# EAGLE board SparkFun_MPU-9250_Breakout.v10a (EAGLE 7.5.0), part 1 of 7
DESIGNER: Brent Wilkins; VERSION: v10
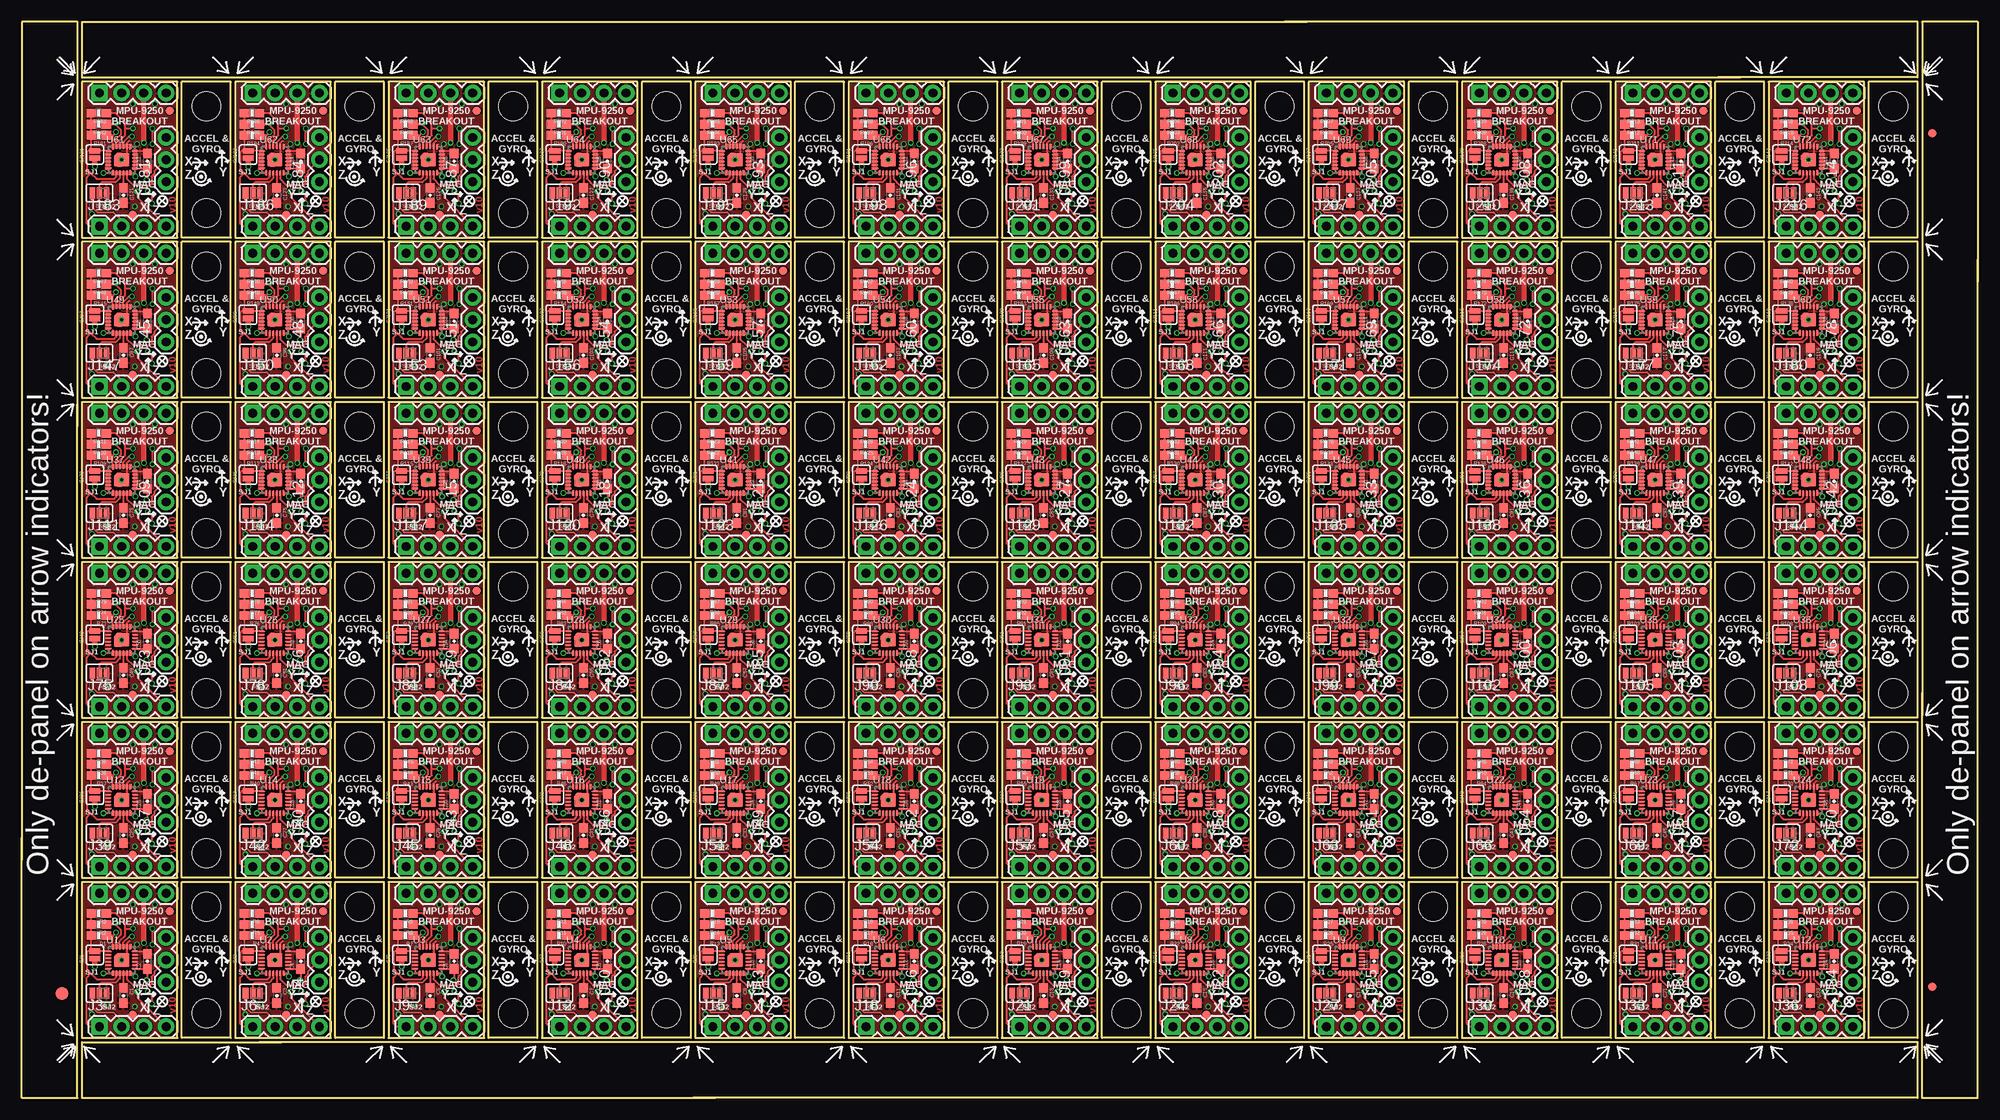
[diagram p0: board, top side]
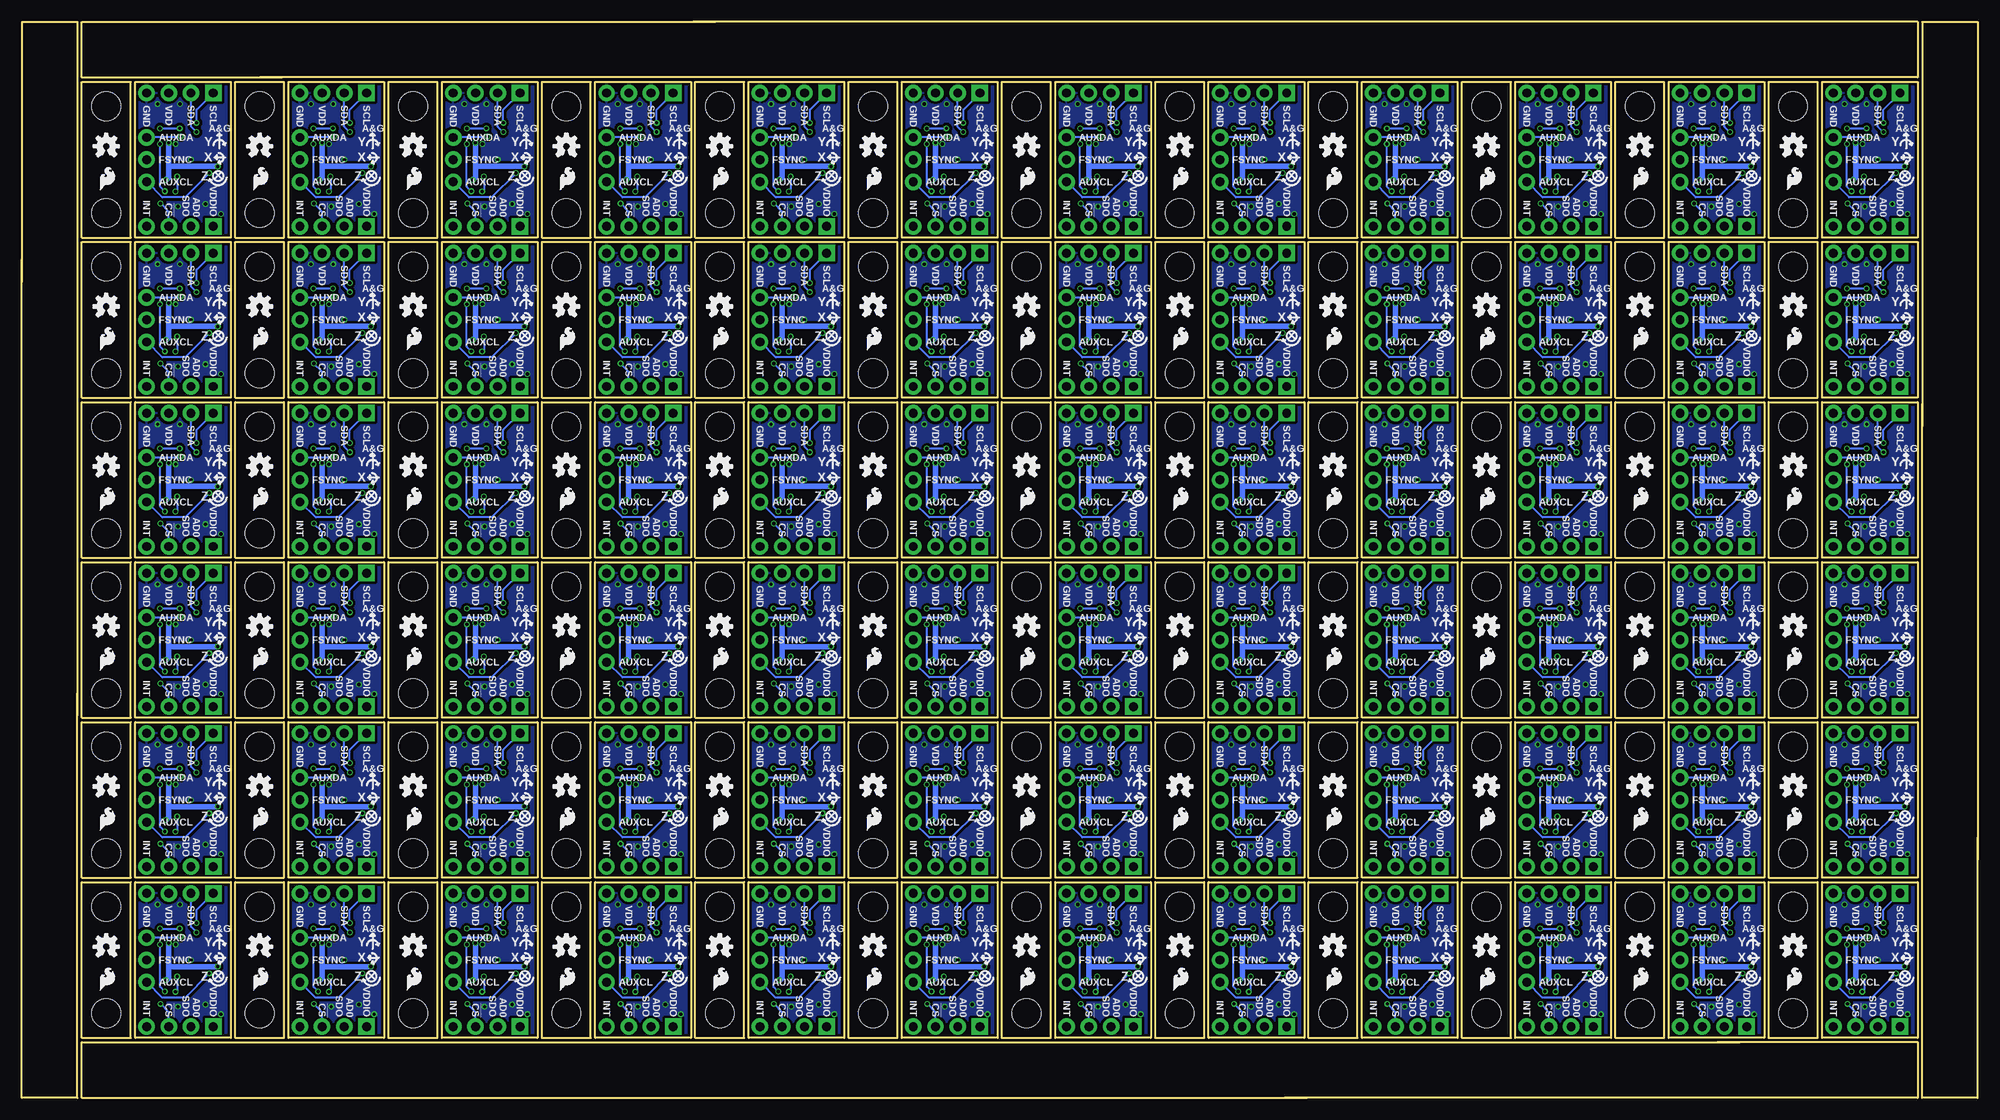
[diagram p1: board, bottom side, seen from below]

Size 223.52 x 122.94 mm. Coordinates in mm from the lower left corner, seen from the top.
Outline: 600 segments
Copper layers (1*16): Top 0.035mm / dielectric 1.5mm / Bottom 0.035mm
Design rules "SparkFun-2-layer-FAB-LIMIT": minimum track width 4mil, minimum drill 6mil, track to track 4mil, track to pad 4mil, pad to pad 4mil, via to via 4mil, smd to smd 4mil, copper to edge 4mil, drill to drill 4mil, minimum pad ring 5mil, minimum via ring 5mil, stop-mask expansion 4mil, vias tented up to drill 20mil, thermal gap 10mil

## Footprints (pad centres in the part's own frame; a part is rotated, then mirrored left to right if it is on the bottom)
0603-CAP = smd 1.1 x 1: 1 -0.85,0; 2 0.85,0
FIDUCIAL-1.5X3 = smd 1.5 x 1.5: 1 0,0
FIDUCIAL-1X2 = smd 1 x 1: 1 0,0
1X04 = drill 1.016 pad 1.88 square: 1 0,0 | drill 1.016 pad 1.88: 2 2.54,0; 3 5.08,0; 4 7.62,0
1X03 = drill 1.016 pad 1.88: 1 0,0; 2 2.54,0; 3 5.08,0
0603-RES = smd 1.1 x 1: 1 -0.85,0; 2 0.85,0
PAD-JUMPER-2-NC_BY_PASTE_YES_SILK_FULL_BOX = smd 0.635 x 1.27: 1 -0.412,0; 2 0.412,0
PAD-HUMPER-3-1&2_NC_BY_PASTE_YES_SILK_FULL_BOX = smd 0.635 x 1.27: 1 -0.813,0; 2 0,0; 3 0.813,0
STAND-OFF = hole 3.302: 0,0
QFN24_PAD = smd 0.5 x 0.25: 1 -1.55,1; 2 -1.55,0.6; 3 -1.55,0.2; 4 -1.55,-0.2; 5 -1.55,-0.6; 6 -1.55,-1; 13 1.55,-1; 14 1.55,-0.6; 15 1.55,-0.2; 16 1.55,0.2; 17 1.55,0.6; 18 1.55,1 | smd 0.08 x 0.13: 1$1 -1.32,1.06; 1$3 -1.26,0.94; P$33 1.26,-0.94; P$34 1.32,-1.06; P$58 1.26,0.94; P$59 1.32,1.06; P$68 -1.26,-0.94; P$69 -1.32,-1.06 | smd 0.1 x 0.185 rotated 45: 1$2 -1.25,1.024; P$49 1.024,-1.25 | smd 0.14 x 0.14: 1$4 -1.22,0.945; P$23 -0.945,-1.22; P$24 1.22,-0.945; P$36 0.945,1.22; P$51 0.945,-1.22; P$56 1.22,0.945; P$61 -0.945,1.22; P$66 -1.22,-0.945 | smd 0.05 x 0.05: 1$5 -1.175,0.97; P$25 -0.97,-1.175; P$31 1.175,-0.97; P$37 0.97,1.175; P$52 0.97,-1.175; P$57 1.175,0.97; P$62 -0.97,1.175; P$67 -1.175,-0.97 | smd 0.25 x 0.5: 7 -1,-1.55; 8 -0.6,-1.55; 9 -0.2,-1.55; 10 0.2,-1.55; 11 0.6,-1.55; 12 1,-1.55; 19 1,1.55; 20 0.6,1.55; 21 0.2,1.55; 22 -0.2,1.55; 23 -0.6,1.55; 24 -1,1.55 | smd 0.25 x 0.25: CENTER 0,0 | smd 0.4 x 0.4: DBBADFE -0.675,0.24 | smd 0.6 x 1.2: DBBADFE1 -0.575,-0.195 | smd 0.25 x 0.3: P$1 -0.2,1.3; P$3 0.2,1.3; P$5 0.6,1.3; P$11 -0.6,1.3; P$16 0.2,-1.3; P$18 -0.2,-1.3; P$20 -0.6,-1.3; P$26 0.6,-1.3 | smd 0.3 x 0.25: P$2 -1.3,0.2; P$4 -1.3,0.6; P$28 -1.3,-0.2; P$38 -1.3,-0.6; P$40 1.3,0.2; P$42 1.3,-0.2; P$44 1.3,-0.6; P$50 1.3,0.6 | smd 0.1 x 0.185 rotated 225: P$7 1.25,-1.024; P$60 -1.024,1.25 | smd 1.1 x 1.59: P$13 0.325,0 | smd 0.3 x 0.5 rotated 315: P$14 -0.592,0.512 | smd 0.5 x 1.59: P$15 -0.27,0 | smd 0.1 x 0.185 rotated 135: P$22 -1.024,-1.25; P$55 1.25,1.024 | smd 0.13 x 0.08: P$27 -0.94,-1.26; P$29 -1.06,-1.32; P$39 0.94,1.26; P$41 1.06,1.32; P$53 0.94,-1.26; P$54 1.06,-1.32; P$63 -0.94,1.26; P$64 -1.06,1.32 | smd 0.1 x 0.185 rotated 315: P$35 1.024,1.25; P$65 -1.25,-1.024

## Placement (x,y rotation side)
C1  0.1uF  [0603-CAP]  11.61,11.68 270 top
C2  0.1uF  [0603-CAP]  14.35,15.6 90 top
C3  0.1uF  [0603-CAP]  29.13,11.68 270 top
C4  0.1uF  [0603-CAP]  31.88,15.6 90 top
C5  0.1uF  [0603-CAP]  46.66,11.68 270 top
C6  0.1uF  [0603-CAP]  49.4,15.6 90 top
C7  0.1uF  [0603-CAP]  64.19,11.68 270 top
C8  0.1uF  [0603-CAP]  66.93,15.6 90 top
C9  0.1uF  [0603-CAP]  81.71,11.68 270 top
C10  0.1uF  [0603-CAP]  84.45,15.6 90 top
C11  0.1uF  [0603-CAP]  99.24,11.68 270 top
C12  0.1uF  [0603-CAP]  101.98,15.6 90 top
C13  0.1uF  [0603-CAP]  116.76,11.68 270 top
C14  0.1uF  [0603-CAP]  119.51,15.6 90 top
C15  0.1uF  [0603-CAP]  134.29,11.68 270 top
C16  0.1uF  [0603-CAP]  137.03,15.6 90 top
C17  0.1uF  [0603-CAP]  151.82,11.68 270 top
C18  0.1uF  [0603-CAP]  154.56,15.6 90 top
C19  0.1uF  [0603-CAP]  169.34,11.68 270 top
C20  0.1uF  [0603-CAP]  172.09,15.6 90 top
C21  0.1uF  [0603-CAP]  186.87,11.68 270 top
C22  0.1uF  [0603-CAP]  189.61,15.6 90 top
C23  0.1uF  [0603-CAP]  204.39,11.68 270 top
C24  0.1uF  [0603-CAP]  207.14,15.6 90 top
C25  0.1uF  [0603-CAP]  11.61,29.97 270 top
C26  0.1uF  [0603-CAP]  14.35,33.88 90 top
C27  0.1uF  [0603-CAP]  29.13,29.97 270 top
C28  0.1uF  [0603-CAP]  31.88,33.88 90 top
C29  0.1uF  [0603-CAP]  46.66,29.97 270 top
C30  0.1uF  [0603-CAP]  49.4,33.88 90 top
C31  0.1uF  [0603-CAP]  64.19,29.97 270 top
C32  0.1uF  [0603-CAP]  66.93,33.88 90 top
C33  0.1uF  [0603-CAP]  81.71,29.97 270 top
C34  0.1uF  [0603-CAP]  84.45,33.88 90 top
C35  0.1uF  [0603-CAP]  99.24,29.97 270 top
C36  0.1uF  [0603-CAP]  101.98,33.88 90 top
C37  0.1uF  [0603-CAP]  116.76,29.97 270 top
C38  0.1uF  [0603-CAP]  119.51,33.88 90 top
C39  0.1uF  [0603-CAP]  134.29,29.97 270 top
C40  0.1uF  [0603-CAP]  137.03,33.88 90 top
C41  0.1uF  [0603-CAP]  151.82,29.97 270 top
C42  0.1uF  [0603-CAP]  154.56,33.88 90 top
C43  0.1uF  [0603-CAP]  169.34,29.97 270 top
C44  0.1uF  [0603-CAP]  172.09,33.88 90 top
C45  0.1uF  [0603-CAP]  186.87,29.97 270 top
C46  0.1uF  [0603-CAP]  189.61,33.88 90 top
C47  0.1uF  [0603-CAP]  204.39,29.97 270 top
C48  0.1uF  [0603-CAP]  207.14,33.88 90 top
C49  0.1uF  [0603-CAP]  11.61,48.26 270 top
C50  0.1uF  [0603-CAP]  14.35,52.17 90 top
C51  0.1uF  [0603-CAP]  29.13,48.26 270 top
C52  0.1uF  [0603-CAP]  31.88,52.17 90 top
C53  0.1uF  [0603-CAP]  46.66,48.26 270 top
C54  0.1uF  [0603-CAP]  49.4,52.17 90 top
C55  0.1uF  [0603-CAP]  64.19,48.26 270 top
C56  0.1uF  [0603-CAP]  66.93,52.17 90 top
C57  0.1uF  [0603-CAP]  81.71,48.26 270 top
C58  0.1uF  [0603-CAP]  84.45,52.17 90 top
C59  0.1uF  [0603-CAP]  99.24,48.26 270 top
C60  0.1uF  [0603-CAP]  101.98,52.17 90 top
C61  0.1uF  [0603-CAP]  116.76,48.26 270 top
C62  0.1uF  [0603-CAP]  119.51,52.17 90 top
C63  0.1uF  [0603-CAP]  134.29,48.26 270 top
C64  0.1uF  [0603-CAP]  137.03,52.17 90 top
C65  0.1uF  [0603-CAP]  151.82,48.26 270 top
C66  0.1uF  [0603-CAP]  154.56,52.17 90 top
C67  0.1uF  [0603-CAP]  169.34,48.26 270 top
C68  0.1uF  [0603-CAP]  172.09,52.17 90 top
C69  0.1uF  [0603-CAP]  186.87,48.26 270 top
C70  0.1uF  [0603-CAP]  189.61,52.17 90 top
C71  0.1uF  [0603-CAP]  204.39,48.26 270 top
C72  0.1uF  [0603-CAP]  207.14,52.17 90 top
C73  0.1uF  [0603-CAP]  11.61,66.55 270 top
C74  0.1uF  [0603-CAP]  14.35,70.46 90 top
C75  0.1uF  [0603-CAP]  29.13,66.55 270 top
C76  0.1uF  [0603-CAP]  31.88,70.46 90 top
C77  0.1uF  [0603-CAP]  46.66,66.55 270 top
C78  0.1uF  [0603-CAP]  49.4,70.46 90 top
C79  0.1uF  [0603-CAP]  64.19,66.55 270 top
C80  0.1uF  [0603-CAP]  66.93,70.46 90 top
C81  0.1uF  [0603-CAP]  81.71,66.55 270 top
C82  0.1uF  [0603-CAP]  84.45,70.46 90 top
C83  0.1uF  [0603-CAP]  99.24,66.55 270 top
C84  0.1uF  [0603-CAP]  101.98,70.46 90 top
C85  0.1uF  [0603-CAP]  116.76,66.55 270 top
C86  0.1uF  [0603-CAP]  119.51,70.46 90 top
C87  0.1uF  [0603-CAP]  134.29,66.55 270 top
C88  0.1uF  [0603-CAP]  137.03,70.46 90 top
C89  0.1uF  [0603-CAP]  151.82,66.55 270 top
C90  0.1uF  [0603-CAP]  154.56,70.46 90 top
C91  0.1uF  [0603-CAP]  169.34,66.55 270 top
C92  0.1uF  [0603-CAP]  172.09,70.46 90 top
C93  0.1uF  [0603-CAP]  186.87,66.55 270 top
C94  0.1uF  [0603-CAP]  189.61,70.46 90 top
C95  0.1uF  [0603-CAP]  204.39,66.55 270 top
C96  0.1uF  [0603-CAP]  207.14,70.46 90 top
C97  0.1uF  [0603-CAP]  11.61,84.84 270 top
C98  0.1uF  [0603-CAP]  14.35,88.75 90 top
C99  0.1uF  [0603-CAP]  29.13,84.84 270 top
C100  0.1uF  [0603-CAP]  31.88,88.75 90 top
C101  0.1uF  [0603-CAP]  46.66,84.84 270 top
C102  0.1uF  [0603-CAP]  49.4,88.75 90 top
C103  0.1uF  [0603-CAP]  64.19,84.84 270 top
C104  0.1uF  [0603-CAP]  66.93,88.75 90 top
C105  0.1uF  [0603-CAP]  81.71,84.84 270 top
C106  0.1uF  [0603-CAP]  84.45,88.75 90 top
C107  0.1uF  [0603-CAP]  99.24,84.84 270 top
C108  0.1uF  [0603-CAP]  101.98,88.75 90 top
C109  0.1uF  [0603-CAP]  116.76,84.84 270 top
C110  0.1uF  [0603-CAP]  119.51,88.75 90 top
C111  0.1uF  [0603-CAP]  134.29,84.84 270 top
C112  0.1uF  [0603-CAP]  137.03,88.75 90 top
C113  0.1uF  [0603-CAP]  151.82,84.84 270 top
C114  0.1uF  [0603-CAP]  154.56,88.75 90 top
C115  0.1uF  [0603-CAP]  169.34,84.84 270 top
C116  0.1uF  [0603-CAP]  172.09,88.75 90 top
C117  0.1uF  [0603-CAP]  186.87,84.84 270 top
C118  0.1uF  [0603-CAP]  189.61,88.75 90 top
C119  0.1uF  [0603-CAP]  204.39,84.84 270 top
C120  0.1uF  [0603-CAP]  207.14,88.75 90 top
C121  0.1uF  [0603-CAP]  11.61,103.12 270 top
C122  0.1uF  [0603-CAP]  14.35,107.04 90 top
C123  0.1uF  [0603-CAP]  29.13,103.12 270 top
C124  0.1uF  [0603-CAP]  31.88,107.04 90 top
C125  0.1uF  [0603-CAP]  46.66,103.12 270 top
C126  0.1uF  [0603-CAP]  49.4,107.04 90 top
C127  0.1uF  [0603-CAP]  64.19,103.12 270 top
C128  0.1uF  [0603-CAP]  66.93,107.04 90 top
C129  0.1uF  [0603-CAP]  81.71,103.12 270 top
C130  0.1uF  [0603-CAP]  84.45,107.04 90 top
C131  0.1uF  [0603-CAP]  99.24,103.12 270 top
C132  0.1uF  [0603-CAP]  101.98,107.04 90 top
C133  0.1uF  [0603-CAP]  116.76,103.12 270 top
C134  0.1uF  [0603-CAP]  119.51,107.04 90 top
C135  0.1uF  [0603-CAP]  134.29,103.12 270 top
C136  0.1uF  [0603-CAP]  137.03,107.04 90 top
C137  0.1uF  [0603-CAP]  151.82,103.12 270 top
C138  0.1uF  [0603-CAP]  154.56,107.04 90 top
C139  0.1uF  [0603-CAP]  169.34,103.12 270 top
C140  0.1uF  [0603-CAP]  172.09,107.04 90 top
C141  0.1uF  [0603-CAP]  186.87,103.12 270 top
C142  0.1uF  [0603-CAP]  189.61,107.04 90 top
C143  0.1uF  [0603-CAP]  204.39,103.12 270 top
C144  0.1uF  [0603-CAP]  207.14,107.04 90 top
E$1  [FIDUCIAL-1.5X3]  4.57,11.94 0 top
E$5  [FIDUCIAL-1X2]  218.31,110.24 180 top
E$6  [FIDUCIAL-1X2]  218.31,12.7 0 top
FID1  FIDUCIAL1X2  [FIDUCIAL-1X2]  16.92,21.34 0 top
FID2  FIDUCIAL1X2  [FIDUCIAL-1X2]  12.67,9.47 0 top
FID3  FIDUCIAL1X2  [FIDUCIAL-1X2]  34.44,21.34 0 top
FID4  FIDUCIAL1X2  [FIDUCIAL-1X2]  30.2,9.47 0 top
FID5  FIDUCIAL1X2  [FIDUCIAL-1X2]  51.97,21.34 0 top
FID6  FIDUCIAL1X2  [FIDUCIAL-1X2]  47.73,9.47 0 top
FID7  FIDUCIAL1X2  [FIDUCIAL-1X2]  69.49,21.34 0 top
FID8  FIDUCIAL1X2  [FIDUCIAL-1X2]  65.25,9.47 0 top
FID9  FIDUCIAL1X2  [FIDUCIAL-1X2]  87.02,21.34 0 top
FID10  FIDUCIAL1X2  [FIDUCIAL-1X2]  82.78,9.47 0 top
FID11  FIDUCIAL1X2  [FIDUCIAL-1X2]  104.55,21.34 0 top
FID12  FIDUCIAL1X2  [FIDUCIAL-1X2]  100.3,9.47 0 top
FID13  FIDUCIAL1X2  [FIDUCIAL-1X2]  122.07,21.34 0 top
FID14  FIDUCIAL1X2  [FIDUCIAL-1X2]  117.83,9.47 0 top
FID15  FIDUCIAL1X2  [FIDUCIAL-1X2]  139.6,21.34 0 top
FID16  FIDUCIAL1X2  [FIDUCIAL-1X2]  135.36,9.47 0 top
FID17  FIDUCIAL1X2  [FIDUCIAL-1X2]  157.12,21.34 0 top
FID18  FIDUCIAL1X2  [FIDUCIAL-1X2]  152.88,9.47 0 top
FID19  FIDUCIAL1X2  [FIDUCIAL-1X2]  174.65,21.34 0 top
FID20  FIDUCIAL1X2  [FIDUCIAL-1X2]  170.41,9.47 0 top
FID21  FIDUCIAL1X2  [FIDUCIAL-1X2]  192.18,21.34 0 top
FID22  FIDUCIAL1X2  [FIDUCIAL-1X2]  187.93,9.47 0 top
FID23  FIDUCIAL1X2  [FIDUCIAL-1X2]  209.7,21.34 0 top
FID24  FIDUCIAL1X2  [FIDUCIAL-1X2]  205.46,9.47 0 top
FID25  FIDUCIAL1X2  [FIDUCIAL-1X2]  16.92,39.62 0 top
FID26  FIDUCIAL1X2  [FIDUCIAL-1X2]  12.67,27.76 0 top
FID27  FIDUCIAL1X2  [FIDUCIAL-1X2]  34.44,39.62 0 top
FID28  FIDUCIAL1X2  [FIDUCIAL-1X2]  30.2,27.76 0 top
FID29  FIDUCIAL1X2  [FIDUCIAL-1X2]  51.97,39.62 0 top
FID30  FIDUCIAL1X2  [FIDUCIAL-1X2]  47.73,27.76 0 top
FID31  FIDUCIAL1X2  [FIDUCIAL-1X2]  69.49,39.62 0 top
FID32  FIDUCIAL1X2  [FIDUCIAL-1X2]  65.25,27.76 0 top
FID33  FIDUCIAL1X2  [FIDUCIAL-1X2]  87.02,39.62 0 top
FID34  FIDUCIAL1X2  [FIDUCIAL-1X2]  82.78,27.76 0 top
FID35  FIDUCIAL1X2  [FIDUCIAL-1X2]  104.55,39.62 0 top
FID36  FIDUCIAL1X2  [FIDUCIAL-1X2]  100.3,27.76 0 top
FID37  FIDUCIAL1X2  [FIDUCIAL-1X2]  122.07,39.62 0 top
FID38  FIDUCIAL1X2  [FIDUCIAL-1X2]  117.83,27.76 0 top
FID39  FIDUCIAL1X2  [FIDUCIAL-1X2]  139.6,39.62 0 top
FID40  FIDUCIAL1X2  [FIDUCIAL-1X2]  135.36,27.76 0 top
FID41  FIDUCIAL1X2  [FIDUCIAL-1X2]  157.12,39.62 0 top
FID42  FIDUCIAL1X2  [FIDUCIAL-1X2]  152.88,27.76 0 top
FID43  FIDUCIAL1X2  [FIDUCIAL-1X2]  174.65,39.62 0 top
FID44  FIDUCIAL1X2  [FIDUCIAL-1X2]  170.41,27.76 0 top
FID45  FIDUCIAL1X2  [FIDUCIAL-1X2]  192.18,39.62 0 top
FID46  FIDUCIAL1X2  [FIDUCIAL-1X2]  187.93,27.76 0 top
FID47  FIDUCIAL1X2  [FIDUCIAL-1X2]  209.7,39.62 0 top
FID48  FIDUCIAL1X2  [FIDUCIAL-1X2]  205.46,27.76 0 top
FID49  FIDUCIAL1X2  [FIDUCIAL-1X2]  16.92,57.91 0 top
FID50  FIDUCIAL1X2  [FIDUCIAL-1X2]  12.67,46.05 0 top
FID51  FIDUCIAL1X2  [FIDUCIAL-1X2]  34.44,57.91 0 top
FID52  FIDUCIAL1X2  [FIDUCIAL-1X2]  30.2,46.05 0 top
FID53  FIDUCIAL1X2  [FIDUCIAL-1X2]  51.97,57.91 0 top
FID54  FIDUCIAL1X2  [FIDUCIAL-1X2]  47.73,46.05 0 top
FID55  FIDUCIAL1X2  [FIDUCIAL-1X2]  69.49,57.91 0 top
FID56  FIDUCIAL1X2  [FIDUCIAL-1X2]  65.25,46.05 0 top
FID57  FIDUCIAL1X2  [FIDUCIAL-1X2]  87.02,57.91 0 top
FID58  FIDUCIAL1X2  [FIDUCIAL-1X2]  82.78,46.05 0 top
FID59  FIDUCIAL1X2  [FIDUCIAL-1X2]  104.55,57.91 0 top
FID60  FIDUCIAL1X2  [FIDUCIAL-1X2]  100.3,46.05 0 top
FID61  FIDUCIAL1X2  [FIDUCIAL-1X2]  122.07,57.91 0 top
FID62  FIDUCIAL1X2  [FIDUCIAL-1X2]  117.83,46.05 0 top
FID63  FIDUCIAL1X2  [FIDUCIAL-1X2]  139.6,57.91 0 top
FID64  FIDUCIAL1X2  [FIDUCIAL-1X2]  135.36,46.05 0 top
FID65  FIDUCIAL1X2  [FIDUCIAL-1X2]  157.12,57.91 0 top
FID66  FIDUCIAL1X2  [FIDUCIAL-1X2]  152.88,46.05 0 top
FID67  FIDUCIAL1X2  [FIDUCIAL-1X2]  174.65,57.91 0 top
FID68  FIDUCIAL1X2  [FIDUCIAL-1X2]  170.41,46.05 0 top
FID69  FIDUCIAL1X2  [FIDUCIAL-1X2]  192.18,57.91 0 top
FID70  FIDUCIAL1X2  [FIDUCIAL-1X2]  187.93,46.05 0 top
FID71  FIDUCIAL1X2  [FIDUCIAL-1X2]  209.7,57.91 0 top
FID72  FIDUCIAL1X2  [FIDUCIAL-1X2]  205.46,46.05 0 top
FID73  FIDUCIAL1X2  [FIDUCIAL-1X2]  16.92,76.2 0 top
FID74  FIDUCIAL1X2  [FIDUCIAL-1X2]  12.67,64.34 0 top
FID75  FIDUCIAL1X2  [FIDUCIAL-1X2]  34.44,76.2 0 top
FID76  FIDUCIAL1X2  [FIDUCIAL-1X2]  30.2,64.34 0 top
FID77  FIDUCIAL1X2  [FIDUCIAL-1X2]  51.97,76.2 0 top
FID78  FIDUCIAL1X2  [FIDUCIAL-1X2]  47.73,64.34 0 top
FID79  FIDUCIAL1X2  [FIDUCIAL-1X2]  69.49,76.2 0 top
FID80  FIDUCIAL1X2  [FIDUCIAL-1X2]  65.25,64.34 0 top
FID81  FIDUCIAL1X2  [FIDUCIAL-1X2]  87.02,76.2 0 top
FID82  FIDUCIAL1X2  [FIDUCIAL-1X2]  82.78,64.34 0 top
FID83  FIDUCIAL1X2  [FIDUCIAL-1X2]  104.55,76.2 0 top
FID84  FIDUCIAL1X2  [FIDUCIAL-1X2]  100.3,64.34 0 top
FID85  FIDUCIAL1X2  [FIDUCIAL-1X2]  122.07,76.2 0 top
FID86  FIDUCIAL1X2  [FIDUCIAL-1X2]  117.83,64.34 0 top
FID87  FIDUCIAL1X2  [FIDUCIAL-1X2]  139.6,76.2 0 top
FID88  FIDUCIAL1X2  [FIDUCIAL-1X2]  135.36,64.34 0 top
FID89  FIDUCIAL1X2  [FIDUCIAL-1X2]  157.12,76.2 0 top
FID90  FIDUCIAL1X2  [FIDUCIAL-1X2]  152.88,64.34 0 top
FID91  FIDUCIAL1X2  [FIDUCIAL-1X2]  174.65,76.2 0 top
FID92  FIDUCIAL1X2  [FIDUCIAL-1X2]  170.41,64.34 0 top
FID93  FIDUCIAL1X2  [FIDUCIAL-1X2]  192.18,76.2 0 top
FID94  FIDUCIAL1X2  [FIDUCIAL-1X2]  187.93,64.34 0 top
FID95  FIDUCIAL1X2  [FIDUCIAL-1X2]  209.7,76.2 0 top
FID96  FIDUCIAL1X2  [FIDUCIAL-1X2]  205.46,64.34 0 top
FID97  FIDUCIAL1X2  [FIDUCIAL-1X2]  16.92,94.49 0 top
FID98  FIDUCIAL1X2  [FIDUCIAL-1X2]  12.67,82.63 0 top
FID99  FIDUCIAL1X2  [FIDUCIAL-1X2]  34.44,94.49 0 top
FID100  FIDUCIAL1X2  [FIDUCIAL-1X2]  30.2,82.63 0 top
FID101  FIDUCIAL1X2  [FIDUCIAL-1X2]  51.97,94.49 0 top
FID102  FIDUCIAL1X2  [FIDUCIAL-1X2]  47.73,82.63 0 top
FID103  FIDUCIAL1X2  [FIDUCIAL-1X2]  69.49,94.49 0 top
FID104  FIDUCIAL1X2  [FIDUCIAL-1X2]  65.25,82.63 0 top
FID105  FIDUCIAL1X2  [FIDUCIAL-1X2]  87.02,94.49 0 top
FID106  FIDUCIAL1X2  [FIDUCIAL-1X2]  82.78,82.63 0 top
FID107  FIDUCIAL1X2  [FIDUCIAL-1X2]  104.55,94.49 0 top
FID108  FIDUCIAL1X2  [FIDUCIAL-1X2]  100.3,82.63 0 top
FID109  FIDUCIAL1X2  [FIDUCIAL-1X2]  122.07,94.49 0 top
FID110  FIDUCIAL1X2  [FIDUCIAL-1X2]  117.83,82.63 0 top
FID111  FIDUCIAL1X2  [FIDUCIAL-1X2]  139.6,94.49 0 top
FID112  FIDUCIAL1X2  [FIDUCIAL-1X2]  135.36,82.63 0 top
FID113  FIDUCIAL1X2  [FIDUCIAL-1X2]  157.12,94.49 0 top
FID114  FIDUCIAL1X2  [FIDUCIAL-1X2]  152.88,82.63 0 top
FID115  FIDUCIAL1X2  [FIDUCIAL-1X2]  174.65,94.49 0 top
FID116  FIDUCIAL1X2  [FIDUCIAL-1X2]  170.41,82.63 0 top
FID117  FIDUCIAL1X2  [FIDUCIAL-1X2]  192.18,94.49 0 top
FID118  FIDUCIAL1X2  [FIDUCIAL-1X2]  187.93,82.63 0 top
FID119  FIDUCIAL1X2  [FIDUCIAL-1X2]  209.7,94.49 0 top
FID120  FIDUCIAL1X2  [FIDUCIAL-1X2]  205.46,82.63 0 top
FID121  FIDUCIAL1X2  [FIDUCIAL-1X2]  16.92,112.78 0 top
FID122  FIDUCIAL1X2  [FIDUCIAL-1X2]  12.67,100.91 0 top
FID123  FIDUCIAL1X2  [FIDUCIAL-1X2]  34.44,112.78 0 top
FID124  FIDUCIAL1X2  [FIDUCIAL-1X2]  30.2,100.91 0 top
FID125  FIDUCIAL1X2  [FIDUCIAL-1X2]  51.97,112.78 0 top
FID126  FIDUCIAL1X2  [FIDUCIAL-1X2]  47.73,100.91 0 top
FID127  FIDUCIAL1X2  [FIDUCIAL-1X2]  69.49,112.78 0 top
FID128  FIDUCIAL1X2  [FIDUCIAL-1X2]  65.25,100.91 0 top
FID129  FIDUCIAL1X2  [FIDUCIAL-1X2]  87.02,112.78 0 top
FID130  FIDUCIAL1X2  [FIDUCIAL-1X2]  82.78,100.91 0 top
FID131  FIDUCIAL1X2  [FIDUCIAL-1X2]  104.55,112.78 0 top
FID132  FIDUCIAL1X2  [FIDUCIAL-1X2]  100.3,100.91 0 top
FID133  FIDUCIAL1X2  [FIDUCIAL-1X2]  122.07,112.78 0 top
FID134  FIDUCIAL1X2  [FIDUCIAL-1X2]  117.83,100.91 0 top
FID135  FIDUCIAL1X2  [FIDUCIAL-1X2]  139.6,112.78 0 top
FID136  FIDUCIAL1X2  [FIDUCIAL-1X2]  135.36,100.91 0 top
FID137  FIDUCIAL1X2  [FIDUCIAL-1X2]  157.12,112.78 0 top
FID138  FIDUCIAL1X2  [FIDUCIAL-1X2]  152.88,100.91 0 top
FID139  FIDUCIAL1X2  [FIDUCIAL-1X2]  174.65,112.78 0 top
FID140  FIDUCIAL1X2  [FIDUCIAL-1X2]  170.41,100.91 0 top
FID141  FIDUCIAL1X2  [FIDUCIAL-1X2]  192.18,112.78 0 top
FID142  FIDUCIAL1X2  [FIDUCIAL-1X2]  187.93,100.91 0 top
FID143  FIDUCIAL1X2  [FIDUCIAL-1X2]  209.7,112.78 0 top
FID144  FIDUCIAL1X2  [FIDUCIAL-1X2]  205.46,100.91 0 top
J1  [1X04]  8.86,23.37 0 top
J2  [1X03]  16.48,13.21 90 top
J3  [1X04]  8.86,8.13 0 top
J4  [1X03]  34.01,13.21 90 top
J5  [1X04]  26.39,23.37 0 top
J6  [1X04]  26.39,8.13 0 top
J7  [1X03]  51.54,13.21 90 top
J8  [1X04]  43.92,23.37 0 top
J9  [1X04]  43.92,8.13 0 top
J10  [1X03]  69.06,13.21 90 top
J11  [1X04]  61.44,23.37 0 top
J12  [1X04]  61.44,8.13 0 top
J13  [1X03]  86.59,13.21 90 top
J14  [1X04]  78.97,23.37 0 top
J15  [1X04]  78.97,8.13 0 top
J16  [1X03]  104.11,13.21 90 top
J17  [1X04]  96.49,23.37 0 top
J18  [1X04]  96.49,8.13 0 top
J19  [1X03]  121.64,13.21 90 top
J20  [1X04]  114.02,23.37 0 top
J21  [1X04]  114.02,8.13 0 top
J22  [1X03]  139.17,13.21 90 top
J23  [1X04]  131.55,23.37 0 top
J24  [1X04]  131.55,8.13 0 top
J25  [1X03]  156.69,13.21 90 top
J26  [1X04]  149.07,23.37 0 top
J27  [1X04]  149.07,8.13 0 top
J28  [1X03]  174.22,13.21 90 top
J29  [1X04]  166.6,23.37 0 top
J30  [1X04]  166.6,8.13 0 top
J31  [1X03]  191.74,13.21 90 top
J32  [1X04]  184.12,23.37 0 top
J33  [1X04]  184.12,8.13 0 top
J34  [1X03]  209.27,13.21 90 top
J35  [1X04]  201.65,23.37 0 top
J36  [1X04]  201.65,8.13 0 top
J37  [1X03]  16.48,31.5 90 top
J38  [1X04]  8.86,41.66 0 top
J39  [1X04]  8.86,26.42 0 top
J40  [1X03]  34.01,31.5 90 top
J41  [1X04]  26.39,41.66 0 top
J42  [1X04]  26.39,26.42 0 top
J43  [1X03]  51.54,31.5 90 top
J44  [1X04]  43.92,41.66 0 top
J45  [1X04]  43.92,26.42 0 top
J46  [1X03]  69.06,31.5 90 top
J47  [1X04]  61.44,41.66 0 top
J48  [1X04]  61.44,26.42 0 top
J49  [1X03]  86.59,31.5 90 top
J50  [1X04]  78.97,41.66 0 top
J51  [1X04]  78.97,26.42 0 top
J52  [1X03]  104.11,31.5 90 top
J53  [1X04]  96.49,41.66 0 top
J54  [1X04]  96.49,26.42 0 top
J55  [1X03]  121.64,31.5 90 top
J56  [1X04]  114.02,41.66 0 top
J57  [1X04]  114.02,26.42 0 top
J58  [1X03]  139.17,31.5 90 top
J59  [1X04]  131.55,41.66 0 top
J60  [1X04]  131.55,26.42 0 top
J61  [1X03]  156.69,31.5 90 top
J62  [1X04]  149.07,41.66 0 top
J63  [1X04]  149.07,26.42 0 top
J64  [1X03]  174.22,31.5 90 top
J65  [1X04]  166.6,41.66 0 top
J66  [1X04]  166.6,26.42 0 top
J67  [1X03]  191.74,31.5 90 top
J68  [1X04]  184.12,41.66 0 top
J69  [1X04]  184.12,26.42 0 top
J70  [1X03]  209.27,31.5 90 top
J71  [1X04]  201.65,41.66 0 top
J72  [1X04]  201.65,26.42 0 top
J73  [1X03]  16.48,49.78 90 top
J74  [1X04]  8.86,59.94 0 top
J75  [1X04]  8.86,44.7 0 top
J76  [1X03]  34.01,49.78 90 top
J77  [1X04]  26.39,59.94 0 top
J78  [1X04]  26.39,44.7 0 top
J79  [1X03]  51.54,49.78 90 top
J80  [1X04]  43.92,59.94 0 top
J81  [1X04]  43.92,44.7 0 top
J82  [1X03]  69.06,49.78 90 top
J83  [1X04]  61.44,59.94 0 top
J84  [1X04]  61.44,44.7 0 top
J85  [1X03]  86.59,49.78 90 top
J86  [1X04]  78.97,59.94 0 top
J87  [1X04]  78.97,44.7 0 top
J88  [1X03]  104.11,49.78 90 top
J89  [1X04]  96.49,59.94 0 top
J90  [1X04]  96.49,44.7 0 top
J91  [1X03]  121.64,49.78 90 top
J92  [1X04]  114.02,59.94 0 top
J93  [1X04]  114.02,44.7 0 top
J94  [1X03]  139.17,49.78 90 top
J95  [1X04]  131.55,59.94 0 top
J96  [1X04]  131.55,44.7 0 top
J97  [1X03]  156.69,49.78 90 top
J98  [1X04]  149.07,59.94 0 top
J99  [1X04]  149.07,44.7 0 top
J100  [1X03]  174.22,49.78 90 top
J101  [1X04]  166.6,59.94 0 top
J102  [1X04]  166.6,44.7 0 top
J103  [1X03]  191.74,49.78 90 top
J104  [1X04]  184.12,59.94 0 top
J105  [1X04]  184.12,44.7 0 top
J106  [1X03]  209.27,49.78 90 top
J107  [1X04]  201.65,59.94 0 top
J108  [1X04]  201.65,44.7 0 top
J109  [1X03]  16.48,68.07 90 top
J110  [1X04]  8.86,78.23 0 top
J111  [1X04]  8.86,62.99 0 top
J112  [1X03]  34.01,68.07 90 top
J113  [1X04]  26.39,78.23 0 top
J114  [1X04]  26.39,62.99 0 top
J115  [1X03]  51.54,68.07 90 top
J116  [1X04]  43.92,78.23 0 top
J117  [1X04]  43.92,62.99 0 top
J118  [1X03]  69.06,68.07 90 top
J119  [1X04]  61.44,78.23 0 top
J120  [1X04]  61.44,62.99 0 top
J121  [1X03]  86.59,68.07 90 top
J122  [1X04]  78.97,78.23 0 top
J123  [1X04]  78.97,62.99 0 top
J124  [1X03]  104.11,68.07 90 top
J125  [1X04]  96.49,78.23 0 top
J126  [1X04]  96.49,62.99 0 top
J127  [1X03]  121.64,68.07 90 top
J128  [1X04]  114.02,78.23 0 top
J129  [1X04]  114.02,62.99 0 top
J130  [1X03]  139.17,68.07 90 top
J131  [1X04]  131.55,78.23 0 top
J132  [1X04]  131.55,62.99 0 top
J133  [1X03]  156.69,68.07 90 top
J134  [1X04]  149.07,78.23 0 top
J135  [1X04]  149.07,62.99 0 top
J136  [1X03]  174.22,68.07 90 top
J137  [1X04]  166.6,78.23 0 top
J138  [1X04]  166.6,62.99 0 top
J139  [1X03]  191.74,68.07 90 top
J140  [1X04]  184.12,78.23 0 top
J141  [1X04]  184.12,62.99 0 top
J142  [1X03]  209.27,68.07 90 top
J143  [1X04]  201.65,78.23 0 top
J144  [1X04]  201.65,62.99 0 top
J145  [1X03]  16.48,86.36 90 top
J146  [1X04]  8.86,96.52 0 top
J147  [1X04]  8.86,81.28 0 top
J148  [1X03]  34.01,86.36 90 top
J149  [1X04]  26.39,96.52 0 top
J150  [1X04]  26.39,81.28 0 top
J151  [1X03]  51.54,86.36 90 top
J152  [1X04]  43.92,96.52 0 top
J153  [1X04]  43.92,81.28 0 top
J154  [1X03]  69.06,86.36 90 top
J155  [1X04]  61.44,96.52 0 top
J156  [1X04]  61.44,81.28 0 top
J157  [1X03]  86.59,86.36 90 top
J158  [1X04]  78.97,96.52 0 top
J159  [1X04]  78.97,81.28 0 top
J160  [1X03]  104.11,86.36 90 top
J161  [1X04]  96.49,96.52 0 top
J162  [1X04]  96.49,81.28 0 top
J163  [1X03]  121.64,86.36 90 top
J164  [1X04]  114.02,96.52 0 top
J165  [1X04]  114.02,81.28 0 top
J166  [1X03]  139.17,86.36 90 top
J167  [1X04]  131.55,96.52 0 top
J168  [1X04]  131.55,81.28 0 top
J169  [1X03]  156.69,86.36 90 top
J170  [1X04]  149.07,96.52 0 top
J171  [1X04]  149.07,81.28 0 top
J172  [1X03]  174.22,86.36 90 top
J173  [1X04]  166.6,96.52 0 top
J174  [1X04]  166.6,81.28 0 top
J175  [1X03]  191.74,86.36 90 top
J176  [1X04]  184.12,96.52 0 top
J177  [1X04]  184.12,81.28 0 top
J178  [1X03]  209.27,86.36 90 top
J179  [1X04]  201.65,96.52 0 top
J180  [1X04]  201.65,81.28 0 top
J181  [1X03]  16.48,104.65 90 top
J182  [1X04]  8.86,114.81 0 top
J183  [1X04]  8.86,99.57 0 top
J184  [1X03]  34.01,104.65 90 top
J185  [1X04]  26.39,114.81 0 top
J186  [1X04]  26.39,99.57 0 top
J187  [1X03]  51.54,104.65 90 top
J188  [1X04]  43.92,114.81 0 top
J189  [1X04]  43.92,99.57 0 top
J190  [1X03]  69.06,104.65 90 top
J191  [1X04]  61.44,114.81 0 top
J192  [1X04]  61.44,99.57 0 top
J193  [1X03]  86.59,104.65 90 top
J194  [1X04]  78.97,114.81 0 top
J195  [1X04]  78.97,99.57 0 top
J196  [1X03]  104.11,104.65 90 top
J197  [1X04]  96.49,114.81 0 top
J198  [1X04]  96.49,99.57 0 top
J199  [1X03]  121.64,104.65 90 top
J200  [1X04]  114.02,114.81 0 top
J201  [1X04]  114.02,99.57 0 top
J202  [1X03]  139.17,104.65 90 top
J203  [1X04]  131.55,114.81 0 top
J204  [1X04]  131.55,99.57 0 top
J205  [1X03]  156.69,104.65 90 top
J206  [1X04]  149.07,114.81 0 top
J207  [1X04]  149.07,99.57 0 top
J208  [1X03]  174.22,104.65 90 top
J209  [1X04]  166.6,114.81 0 top
J210  [1X04]  166.6,99.57 0 top
J211  [1X03]  191.74,104.65 90 top
J212  [1X04]  184.12,114.81 0 top
J213  [1X04]  184.12,99.57 0 top
J214  [1X03]  209.27,104.65 90 top
J215  [1X04]  201.65,114.81 0 top
J216  [1X04]  201.65,99.57 0 top
LOGO1  SFE_LOGO_FLAME.1_INCH  [SFE_LOGO_FLAME_.1]  22.1,11.94 0 bottom
LOGO2  OSHW-LOGOS  [OSHW-LOGO-S]  21.08,17.27 0 bottom
LOGO3  SFE_LOGO_FLAME.1_INCH  [SFE_LOGO_FLAME_.1]  39.62,11.94 0 bottom
LOGO4  OSHW-LOGOS  [OSHW-LOGO-S]  38.61,17.27 0 bottom
LOGO5  SFE_LOGO_FLAME.1_INCH  [SFE_LOGO_FLAME_.1]  57.15,11.94 0 bottom
LOGO6  OSHW-LOGOS  [OSHW-LOGO-S]  56.13,17.27 0 bottom
LOGO7  SFE_LOGO_FLAME.1_INCH  [SFE_LOGO_FLAME_.1]  74.68,11.94 0 bottom
LOGO8  OSHW-LOGOS  [OSHW-LOGO-S]  73.66,17.27 0 bottom
LOGO9  SFE_LOGO_FLAME.1_INCH  [SFE_LOGO_FLAME_.1]  92.2,11.94 0 bottom
LOGO10  OSHW-LOGOS  [OSHW-LOGO-S]  91.19,17.27 0 bottom
LOGO11  SFE_LOGO_FLAME.1_INCH  [SFE_LOGO_FLAME_.1]  109.73,11.94 0 bottom
LOGO12  OSHW-LOGOS  [OSHW-LOGO-S]  108.71,17.27 0 bottom
LOGO13  SFE_LOGO_FLAME.1_INCH  [SFE_LOGO_FLAME_.1]  127.25,11.94 0 bottom
LOGO14  OSHW-LOGOS  [OSHW-LOGO-S]  126.24,17.27 0 bottom
LOGO15  SFE_LOGO_FLAME.1_INCH  [SFE_LOGO_FLAME_.1]  144.78,11.94 0 bottom
LOGO16  OSHW-LOGOS  [OSHW-LOGO-S]  143.76,17.27 0 bottom
LOGO17  SFE_LOGO_FLAME.1_INCH  [SFE_LOGO_FLAME_.1]  162.31,11.94 0 bottom
LOGO18  OSHW-LOGOS  [OSHW-LOGO-S]  161.29,17.27 0 bottom
LOGO19  SFE_LOGO_FLAME.1_INCH  [SFE_LOGO_FLAME_.1]  179.83,11.94 0 bottom
LOGO20  OSHW-LOGOS  [OSHW-LOGO-S]  178.82,17.27 0 bottom
LOGO21  SFE_LOGO_FLAME.1_INCH  [SFE_LOGO_FLAME_.1]  197.36,11.94 0 bottom
LOGO22  OSHW-LOGOS  [OSHW-LOGO-S]  196.34,17.27 0 bottom
LOGO23  SFE_LOGO_FLAME.1_INCH  [SFE_LOGO_FLAME_.1]  214.88,11.94 0 bottom
LOGO24  OSHW-LOGOS  [OSHW-LOGO-S]  213.87,17.27 0 bottom
LOGO25  SFE_LOGO_FLAME.1_INCH  [SFE_LOGO_FLAME_.1]  22.1,30.23 0 bottom
LOGO26  OSHW-LOGOS  [OSHW-LOGO-S]  21.08,35.56 0 bottom
LOGO27  SFE_LOGO_FLAME.1_INCH  [SFE_LOGO_FLAME_.1]  39.62,30.23 0 bottom
LOGO28  OSHW-LOGOS  [OSHW-LOGO-S]  38.61,35.56 0 bottom
LOGO29  SFE_LOGO_FLAME.1_INCH  [SFE_LOGO_FLAME_.1]  57.15,30.23 0 bottom
LOGO30  OSHW-LOGOS  [OSHW-LOGO-S]  56.13,35.56 0 bottom
LOGO31  SFE_LOGO_FLAME.1_INCH  [SFE_LOGO_FLAME_.1]  74.68,30.23 0 bottom
LOGO32  OSHW-LOGOS  [OSHW-LOGO-S]  73.66,35.56 0 bottom
LOGO33  SFE_LOGO_FLAME.1_INCH  [SFE_LOGO_FLAME_.1]  92.2,30.23 0 bottom
LOGO34  OSHW-LOGOS  [OSHW-LOGO-S]  91.19,35.56 0 bottom
LOGO35  SFE_LOGO_FLAME.1_INCH  [SFE_LOGO_FLAME_.1]  109.73,30.23 0 bottom
LOGO36  OSHW-LOGOS  [OSHW-LOGO-S]  108.71,35.56 0 bottom
LOGO37  SFE_LOGO_FLAME.1_INCH  [SFE_LOGO_FLAME_.1]  127.25,30.23 0 bottom
LOGO38  OSHW-LOGOS  [OSHW-LOGO-S]  126.24,35.56 0 bottom
LOGO39  SFE_LOGO_FLAME.1_INCH  [SFE_LOGO_FLAME_.1]  144.78,30.23 0 bottom
LOGO40  OSHW-LOGOS  [OSHW-LOGO-S]  143.76,35.56 0 bottom
LOGO41  SFE_LOGO_FLAME.1_INCH  [SFE_LOGO_FLAME_.1]  162.31,30.23 0 bottom
LOGO42  OSHW-LOGOS  [OSHW-LOGO-S]  161.29,35.56 0 bottom
LOGO43  SFE_LOGO_FLAME.1_INCH  [SFE_LOGO_FLAME_.1]  179.83,30.23 0 bottom
LOGO44  OSHW-LOGOS  [OSHW-LOGO-S]  178.82,35.56 0 bottom
LOGO45  SFE_LOGO_FLAME.1_INCH  [SFE_LOGO_FLAME_.1]  197.36,30.23 0 bottom
LOGO46  OSHW-LOGOS  [OSHW-LOGO-S]  196.34,35.56 0 bottom
LOGO47  SFE_LOGO_FLAME.1_INCH  [SFE_LOGO_FLAME_.1]  214.88,30.23 0 bottom
LOGO48  OSHW-LOGOS  [OSHW-LOGO-S]  213.87,35.56 0 bottom
LOGO49  SFE_LOGO_FLAME.1_INCH  [SFE_LOGO_FLAME_.1]  22.1,48.51 0 bottom
LOGO50  OSHW-LOGOS  [OSHW-LOGO-S]  21.08,53.85 0 bottom
LOGO51  SFE_LOGO_FLAME.1_INCH  [SFE_LOGO_FLAME_.1]  39.62,48.51 0 bottom
LOGO52  OSHW-LOGOS  [OSHW-LOGO-S]  38.61,53.85 0 bottom
LOGO53  SFE_LOGO_FLAME.1_INCH  [SFE_LOGO_FLAME_.1]  57.15,48.51 0 bottom
LOGO54  OSHW-LOGOS  [OSHW-LOGO-S]  56.13,53.85 0 bottom
LOGO55  SFE_LOGO_FLAME.1_INCH  [SFE_LOGO_FLAME_.1]  74.68,48.51 0 bottom
LOGO56  OSHW-LOGOS  [OSHW-LOGO-S]  73.66,53.85 0 bottom
LOGO57  SFE_LOGO_FLAME.1_INCH  [SFE_LOGO_FLAME_.1]  92.2,48.51 0 bottom
LOGO58  OSHW-LOGOS  [OSHW-LOGO-S]  91.19,53.85 0 bottom
LOGO59  SFE_LOGO_FLAME.1_INCH  [SFE_LOGO_FLAME_.1]  109.73,48.51 0 bottom
LOGO60  OSHW-LOGOS  [OSHW-LOGO-S]  108.71,53.85 0 bottom
LOGO61  SFE_LOGO_FLAME.1_INCH  [SFE_LOGO_FLAME_.1]  127.25,48.51 0 bottom
LOGO62  OSHW-LOGOS  [OSHW-LOGO-S]  126.24,53.85 0 bottom
LOGO63  SFE_LOGO_FLAME.1_INCH  [SFE_LOGO_FLAME_.1]  144.78,48.51 0 bottom
LOGO64  OSHW-LOGOS  [OSHW-LOGO-S]  143.76,53.85 0 bottom
LOGO65  SFE_LOGO_FLAME.1_INCH  [SFE_LOGO_FLAME_.1]  162.31,48.51 0 bottom
LOGO66  OSHW-LOGOS  [OSHW-LOGO-S]  161.29,53.85 0 bottom
LOGO67  SFE_LOGO_FLAME.1_INCH  [SFE_LOGO_FLAME_.1]  179.83,48.51 0 bottom
LOGO68  OSHW-LOGOS  [OSHW-LOGO-S]  178.82,53.85 0 bottom
LOGO69  SFE_LOGO_FLAME.1_INCH  [SFE_LOGO_FLAME_.1]  197.36,48.51 0 bottom
LOGO70  OSHW-LOGOS  [OSHW-LOGO-S]  196.34,53.85 0 bottom
LOGO71  SFE_LOGO_FLAME.1_INCH  [SFE_LOGO_FLAME_.1]  214.88,48.51 0 bottom
LOGO72  OSHW-LOGOS  [OSHW-LOGO-S]  213.87,53.85 0 bottom
LOGO73  SFE_LOGO_FLAME.1_INCH  [SFE_LOGO_FLAME_.1]  22.1,66.8 0 bottom
LOGO74  OSHW-LOGOS  [OSHW-LOGO-S]  21.08,72.14 0 bottom
LOGO75  SFE_LOGO_FLAME.1_INCH  [SFE_LOGO_FLAME_.1]  39.62,66.8 0 bottom
LOGO76  OSHW-LOGOS  [OSHW-LOGO-S]  38.61,72.14 0 bottom
LOGO77  SFE_LOGO_FLAME.1_INCH  [SFE_LOGO_FLAME_.1]  57.15,66.8 0 bottom
LOGO78  OSHW-LOGOS  [OSHW-LOGO-S]  56.13,72.14 0 bottom
LOGO79  SFE_LOGO_FLAME.1_INCH  [SFE_LOGO_FLAME_.1]  74.68,66.8 0 bottom
LOGO80  OSHW-LOGOS  [OSHW-LOGO-S]  73.66,72.14 0 bottom
LOGO81  SFE_LOGO_FLAME.1_INCH  [SFE_LOGO_FLAME_.1]  92.2,66.8 0 bottom
LOGO82  OSHW-LOGOS  [OSHW-LOGO-S]  91.19,72.14 0 bottom
LOGO83  SFE_LOGO_FLAME.1_INCH  [SFE_LOGO_FLAME_.1]  109.73,66.8 0 bottom
LOGO84  OSHW-LOGOS  [OSHW-LOGO-S]  108.71,72.14 0 bottom
LOGO85  SFE_LOGO_FLAME.1_INCH  [SFE_LOGO_FLAME_.1]  127.25,66.8 0 bottom
LOGO86  OSHW-LOGOS  [OSHW-LOGO-S]  126.24,72.14 0 bottom
LOGO87  SFE_LOGO_FLAME.1_INCH  [SFE_LOGO_FLAME_.1]  144.78,66.8 0 bottom
LOGO88  OSHW-LOGOS  [OSHW-LOGO-S]  143.76,72.14 0 bottom
LOGO89  SFE_LOGO_FLAME.1_INCH  [SFE_LOGO_FLAME_.1]  162.31,66.8 0 bottom
LOGO90  OSHW-LOGOS  [OSHW-LOGO-S]  161.29,72.14 0 bottom
LOGO91  SFE_LOGO_FLAME.1_INCH  [SFE_LOGO_FLAME_.1]  179.83,66.8 0 bottom
LOGO92  OSHW-LOGOS  [OSHW-LOGO-S]  178.82,72.14 0 bottom
LOGO93  SFE_LOGO_FLAME.1_INCH  [SFE_LOGO_FLAME_.1]  197.36,66.8 0 bottom
LOGO94  OSHW-LOGOS  [OSHW-LOGO-S]  196.34,72.14 0 bottom
LOGO95  SFE_LOGO_FLAME.1_INCH  [SFE_LOGO_FLAME_.1]  214.88,66.8 0 bottom
LOGO96  OSHW-LOGOS  [OSHW-LOGO-S]  213.87,72.14 0 bottom
LOGO97  SFE_LOGO_FLAME.1_INCH  [SFE_LOGO_FLAME_.1]  22.1,85.09 0 bottom
LOGO98  OSHW-LOGOS  [OSHW-LOGO-S]  21.08,90.42 0 bottom
LOGO99  SFE_LOGO_FLAME.1_INCH  [SFE_LOGO_FLAME_.1]  39.62,85.09 0 bottom
LOGO100  OSHW-LOGOS  [OSHW-LOGO-S]  38.61,90.42 0 bottom
LOGO101  SFE_LOGO_FLAME.1_INCH  [SFE_LOGO_FLAME_.1]  57.15,85.09 0 bottom
LOGO102  OSHW-LOGOS  [OSHW-LOGO-S]  56.13,90.42 0 bottom
LOGO103  SFE_LOGO_FLAME.1_INCH  [SFE_LOGO_FLAME_.1]  74.68,85.09 0 bottom
LOGO104  OSHW-LOGOS  [OSHW-LOGO-S]  73.66,90.42 0 bottom
LOGO105  SFE_LOGO_FLAME.1_INCH  [SFE_LOGO_FLAME_.1]  92.2,85.09 0 bottom
LOGO106  OSHW-LOGOS  [OSHW-LOGO-S]  91.19,90.42 0 bottom
LOGO107  SFE_LOGO_FLAME.1_INCH  [SFE_LOGO_FLAME_.1]  109.73,85.09 0 bottom
LOGO108  OSHW-LOGOS  [OSHW-LOGO-S]  108.71,90.42 0 bottom
LOGO109  SFE_LOGO_FLAME.1_INCH  [SFE_LOGO_FLAME_.1]  127.25,85.09 0 bottom
LOGO110  OSHW-LOGOS  [OSHW-LOGO-S]  126.24,90.42 0 bottom
LOGO111  SFE_LOGO_FLAME.1_INCH  [SFE_LOGO_FLAME_.1]  144.78,85.09 0 bottom
LOGO112  OSHW-LOGOS  [OSHW-LOGO-S]  143.76,90.42 0 bottom
LOGO113  SFE_LOGO_FLAME.1_INCH  [SFE_LOGO_FLAME_.1]  162.31,85.09 0 bottom
LOGO114  OSHW-LOGOS  [OSHW-LOGO-S]  161.29,90.42 0 bottom
LOGO115  SFE_LOGO_FLAME.1_INCH  [SFE_LOGO_FLAME_.1]  179.83,85.09 0 bottom
LOGO116  OSHW-LOGOS  [OSHW-LOGO-S]  178.82,90.42 0 bottom
LOGO117  SFE_LOGO_FLAME.1_INCH  [SFE_LOGO_FLAME_.1]  197.36,85.09 0 bottom
LOGO118  OSHW-LOGOS  [OSHW-LOGO-S]  196.34,90.42 0 bottom
LOGO119  SFE_LOGO_FLAME.1_INCH  [SFE_LOGO_FLAME_.1]  214.88,85.09 0 bottom
LOGO120  OSHW-LOGOS  [OSHW-LOGO-S]  213.87,90.42 0 bottom
LOGO121  SFE_LOGO_FLAME.1_INCH  [SFE_LOGO_FLAME_.1]  22.1,103.38 0 bottom
LOGO122  OSHW-LOGOS  [OSHW-LOGO-S]  21.08,108.71 0 bottom
LOGO123  SFE_LOGO_FLAME.1_INCH  [SFE_LOGO_FLAME_.1]  39.62,103.38 0 bottom
LOGO124  OSHW-LOGOS  [OSHW-LOGO-S]  38.61,108.71 0 bottom
LOGO125  SFE_LOGO_FLAME.1_INCH  [SFE_LOGO_FLAME_.1]  57.15,103.38 0 bottom
LOGO126  OSHW-LOGOS  [OSHW-LOGO-S]  56.13,108.71 0 bottom
LOGO127  SFE_LOGO_FLAME.1_INCH  [SFE_LOGO_FLAME_.1]  74.68,103.38 0 bottom
LOGO128  OSHW-LOGOS  [OSHW-LOGO-S]  73.66,108.71 0 bottom
LOGO129  SFE_LOGO_FLAME.1_INCH  [SFE_LOGO_FLAME_.1]  92.2,103.38 0 bottom
LOGO130  OSHW-LOGOS  [OSHW-LOGO-S]  91.19,108.71 0 bottom
LOGO131  SFE_LOGO_FLAME.1_INCH  [SFE_LOGO_FLAME_.1]  109.73,103.38 0 bottom
LOGO132  OSHW-LOGOS  [OSHW-LOGO-S]  108.71,108.71 0 bottom
LOGO133  SFE_LOGO_FLAME.1_INCH  [SFE_LOGO_FLAME_.1]  127.25,103.38 0 bottom
LOGO134  OSHW-LOGOS  [OSHW-LOGO-S]  126.24,108.71 0 bottom
LOGO135  SFE_LOGO_FLAME.1_INCH  [SFE_LOGO_FLAME_.1]  144.78,103.38 0 bottom
LOGO136  OSHW-LOGOS  [OSHW-LOGO-S]  143.76,108.71 0 bottom
LOGO137  SFE_LOGO_FLAME.1_INCH  [SFE_LOGO_FLAME_.1]  162.31,103.38 0 bottom
LOGO138  OSHW-LOGOS  [OSHW-LOGO-S]  161.29,108.71 0 bottom
LOGO139  SFE_LOGO_FLAME.1_INCH  [SFE_LOGO_FLAME_.1]  179.83,103.38 0 bottom
LOGO140  OSHW-LOGOS  [OSHW-LOGO-S]  178.82,108.71 0 bottom
LOGO141  SFE_LOGO_FLAME.1_INCH  [SFE_LOGO_FLAME_.1]  197.36,103.38 0 bottom
LOGO142  OSHW-LOGOS  [OSHW-LOGO-S]  196.34,108.71 0 bottom
LOGO143  SFE_LOGO_FLAME.1_INCH  [SFE_LOGO_FLAME_.1]  214.88,103.38 0 bottom
LOGO144  OSHW-LOGOS  [OSHW-LOGO-S]  213.87,108.71 0 bottom
R1  10K  [0603-RES]  8.79,18.54 180 top
R2  10K  [0603-RES]  8.79,19.81 180 top
R3  10K  [0603-RES]  8.79,21.08 180 top
R4  10K  [0603-RES]  26.31,18.54 180 top
R5  10K  [0603-RES]  26.31,19.81 180 top
R6  10K  [0603-RES]  26.31,21.08 180 top
R7  10K  [0603-RES]  43.84,18.54 180 top
R8  10K  [0603-RES]  43.84,19.81 180 top
R9  10K  [0603-RES]  43.84,21.08 180 top
R10  10K  [0603-RES]  61.37,18.54 180 top
R11  10K  [0603-RES]  61.37,19.81 180 top
R12  10K  [0603-RES]  61.37,21.08 180 top
R13  10K  [0603-RES]  78.89,18.54 180 top
R14  10K  [0603-RES]  78.89,19.81 180 top
R15  10K  [0603-RES]  78.89,21.08 180 top
R16  10K  [0603-RES]  96.42,18.54 180 top
R17  10K  [0603-RES]  96.42,19.81 180 top
R18  10K  [0603-RES]  96.42,21.08 180 top
R19  10K  [0603-RES]  113.94,18.54 180 top
R20  10K  [0603-RES]  113.94,19.81 180 top
R21  10K  [0603-RES]  113.94,21.08 180 top
R22  10K  [0603-RES]  131.47,18.54 180 top
R23  10K  [0603-RES]  131.47,19.81 180 top
R24  10K  [0603-RES]  131.47,21.08 180 top
R25  10K  [0603-RES]  149,18.54 180 top
R26  10K  [0603-RES]  149,19.81 180 top
R27  10K  [0603-RES]  149,21.08 180 top
R28  10K  [0603-RES]  166.52,18.54 180 top
R29  10K  [0603-RES]  166.52,19.81 180 top
R30  10K  [0603-RES]  166.52,21.08 180 top
R31  10K  [0603-RES]  184.05,18.54 180 top
R32  10K  [0603-RES]  184.05,19.81 180 top
R33  10K  [0603-RES]  184.05,21.08 180 top
R34  10K  [0603-RES]  201.57,18.54 180 top
R35  10K  [0603-RES]  201.57,19.81 180 top
R36  10K  [0603-RES]  201.57,21.08 180 top
R37  10K  [0603-RES]  8.79,36.83 180 top
R38  10K  [0603-RES]  8.79,38.1 180 top
R39  10K  [0603-RES]  8.79,39.37 180 top
R40  10K  [0603-RES]  26.31,36.83 180 top
R41  10K  [0603-RES]  26.31,38.1 180 top
R42  10K  [0603-RES]  26.31,39.37 180 top
R43  10K  [0603-RES]  43.84,36.83 180 top
R44  10K  [0603-RES]  43.84,38.1 180 top
R45  10K  [0603-RES]  43.84,39.37 180 top
R46  10K  [0603-RES]  61.37,36.83 180 top
R47  10K  [0603-RES]  61.37,38.1 180 top
R48  10K  [0603-RES]  61.37,39.37 180 top
R49  10K  [0603-RES]  78.89,36.83 180 top
R50  10K  [0603-RES]  78.89,38.1 180 top
R51  10K  [0603-RES]  78.89,39.37 180 top
R52  10K  [0603-RES]  96.42,36.83 180 top
R53  10K  [0603-RES]  96.42,38.1 180 top
R54  10K  [0603-RES]  96.42,39.37 180 top
R55  10K  [0603-RES]  113.94,36.83 180 top
R56  10K  [0603-RES]  113.94,38.1 180 top
R57  10K  [0603-RES]  113.94,39.37 180 top
R58  10K  [0603-RES]  131.47,36.83 180 top
R59  10K  [0603-RES]  131.47,38.1 180 top
R60  10K  [0603-RES]  131.47,39.37 180 top
R61  10K  [0603-RES]  149,36.83 180 top
R62  10K  [0603-RES]  149,38.1 180 top
R63  10K  [0603-RES]  149,39.37 180 top
R64  10K  [0603-RES]  166.52,36.83 180 top
R65  10K  [0603-RES]  166.52,38.1 180 top
R66  10K  [0603-RES]  166.52,39.37 180 top
R67  10K  [0603-RES]  184.05,36.83 180 top
R68  10K  [0603-RES]  184.05,38.1 180 top
R69  10K  [0603-RES]  184.05,39.37 180 top
R70  10K  [0603-RES]  201.57,36.83 180 top
R71  10K  [0603-RES]  201.57,38.1 180 top
R72  10K  [0603-RES]  201.57,39.37 180 top
R73  10K  [0603-RES]  8.79,55.12 180 top
R74  10K  [0603-RES]  8.79,56.39 180 top
R75  10K  [0603-RES]  8.79,57.66 180 top
R76  10K  [0603-RES]  26.31,55.12 180 top
R77  10K  [0603-RES]  26.31,56.39 180 top
R78  10K  [0603-RES]  26.31,57.66 180 top
R79  10K  [0603-RES]  43.84,55.12 180 top
R80  10K  [0603-RES]  43.84,56.39 180 top
R81  10K  [0603-RES]  43.84,57.66 180 top
R82  10K  [0603-RES]  61.37,55.12 180 top
R83  10K  [0603-RES]  61.37,56.39 180 top
R84  10K  [0603-RES]  61.37,57.66 180 top
R85  10K  [0603-RES]  78.89,55.12 180 top
R86  10K  [0603-RES]  78.89,56.39 180 top
R87  10K  [0603-RES]  78.89,57.66 180 top
R88  10K  [0603-RES]  96.42,55.12 180 top
R89  10K  [0603-RES]  96.42,56.39 180 top
R90  10K  [0603-RES]  96.42,57.66 180 top
R91  10K  [0603-RES]  113.94,55.12 180 top
R92  10K  [0603-RES]  113.94,56.39 180 top
R93  10K  [0603-RES]  113.94,57.66 180 top
R94  10K  [0603-RES]  131.47,55.12 180 top
R95  10K  [0603-RES]  131.47,56.39 180 top
R96  10K  [0603-RES]  131.47,57.66 180 top
R97  10K  [0603-RES]  149,55.12 180 top
R98  10K  [0603-RES]  149,56.39 180 top
R99  10K  [0603-RES]  149,57.66 180 top
R100  10K  [0603-RES]  166.52,55.12 180 top
R101  10K  [0603-RES]  166.52,56.39 180 top
R102  10K  [0603-RES]  166.52,57.66 180 top
R103  10K  [0603-RES]  184.05,55.12 180 top
R104  10K  [0603-RES]  184.05,56.39 180 top
R105  10K  [0603-RES]  184.05,57.66 180 top
R106  10K  [0603-RES]  201.57,55.12 180 top
R107  10K  [0603-RES]  201.57,56.39 180 top
R108  10K  [0603-RES]  201.57,57.66 180 top
R109  10K  [0603-RES]  8.79,73.41 180 top
R110  10K  [0603-RES]  8.79,74.68 180 top
R111  10K  [0603-RES]  8.79,75.95 180 top
R112  10K  [0603-RES]  26.31,73.41 180 top
R113  10K  [0603-RES]  26.31,74.68 180 top
R114  10K  [0603-RES]  26.31,75.95 180 top
R115  10K  [0603-RES]  43.84,73.41 180 top
R116  10K  [0603-RES]  43.84,74.68 180 top
R117  10K  [0603-RES]  43.84,75.95 180 top
R118  10K  [0603-RES]  61.37,73.41 180 top
R119  10K  [0603-RES]  61.37,74.68 180 top
R120  10K  [0603-RES]  61.37,75.95 180 top
R121  10K  [0603-RES]  78.89,73.41 180 top
R122  10K  [0603-RES]  78.89,74.68 180 top
R123  10K  [0603-RES]  78.89,75.95 180 top
R124  10K  [0603-RES]  96.42,73.41 180 top
R125  10K  [0603-RES]  96.42,74.68 180 top
R126  10K  [0603-RES]  96.42,75.95 180 top
R127  10K  [0603-RES]  113.94,73.41 180 top
R128  10K  [0603-RES]  113.94,74.68 180 top
R129  10K  [0603-RES]  113.94,75.95 180 top
R130  10K  [0603-RES]  131.47,73.41 180 top
R131  10K  [0603-RES]  131.47,74.68 180 top
R132  10K  [0603-RES]  131.47,75.95 180 top
R133  10K  [0603-RES]  149,73.41 180 top
R134  10K  [0603-RES]  149,74.68 180 top
R135  10K  [0603-RES]  149,75.95 180 top
R136  10K  [0603-RES]  166.52,73.41 180 top
R137  10K  [0603-RES]  166.52,74.68 180 top
R138  10K  [0603-RES]  166.52,75.95 180 top
R139  10K  [0603-RES]  184.05,73.41 180 top
R140  10K  [0603-RES]  184.05,74.68 180 top
R141  10K  [0603-RES]  184.05,75.95 180 top
R142  10K  [0603-RES]  201.57,73.41 180 top
R143  10K  [0603-RES]  201.57,74.68 180 top
R144  10K  [0603-RES]  201.57,75.95 180 top
R145  10K  [0603-RES]  8.79,91.69 180 top
R146  10K  [0603-RES]  8.79,92.96 180 top
R147  10K  [0603-RES]  8.79,94.23 180 top
R148  10K  [0603-RES]  26.31,91.69 180 top
R149  10K  [0603-RES]  26.31,92.96 180 top
R150  10K  [0603-RES]  26.31,94.23 180 top
R151  10K  [0603-RES]  43.84,91.69 180 top
R152  10K  [0603-RES]  43.84,92.96 180 top
R153  10K  [0603-RES]  43.84,94.23 180 top
R154  10K  [0603-RES]  61.37,91.69 180 top
R155  10K  [0603-RES]  61.37,92.96 180 top
R156  10K  [0603-RES]  61.37,94.23 180 top
R157  10K  [0603-RES]  78.89,91.69 180 top
R158  10K  [0603-RES]  78.89,92.96 180 top
R159  10K  [0603-RES]  78.89,94.23 180 top
R160  10K  [0603-RES]  96.42,91.69 180 top
R161  10K  [0603-RES]  96.42,92.96 180 top
R162  10K  [0603-RES]  96.42,94.23 180 top
R163  10K  [0603-RES]  113.94,91.69 180 top
R164  10K  [0603-RES]  113.94,92.96 180 top
R165  10K  [0603-RES]  113.94,94.23 180 top
R166  10K  [0603-RES]  131.47,91.69 180 top
R167  10K  [0603-RES]  131.47,92.96 180 top
R168  10K  [0603-RES]  131.47,94.23 180 top
R169  10K  [0603-RES]  149,91.69 180 top
R170  10K  [0603-RES]  149,92.96 180 top
R171  10K  [0603-RES]  149,94.23 180 top
R172  10K  [0603-RES]  166.52,91.69 180 top
R173  10K  [0603-RES]  166.52,92.96 180 top
R174  10K  [0603-RES]  166.52,94.23 180 top
R175  10K  [0603-RES]  184.05,91.69 180 top
R176  10K  [0603-RES]  184.05,92.96 180 top
R177  10K  [0603-RES]  184.05,94.23 180 top
R178  10K  [0603-RES]  201.57,91.69 180 top
R179  10K  [0603-RES]  201.57,92.96 180 top
R180  10K  [0603-RES]  201.57,94.23 180 top
R181  10K  [0603-RES]  8.79,109.98 180 top
R182  10K  [0603-RES]  8.79,111.25 180 top
R183  10K  [0603-RES]  8.79,112.52 180 top
R184  10K  [0603-RES]  26.31,109.98 180 top
R185  10K  [0603-RES]  26.31,111.25 180 top
R186  10K  [0603-RES]  26.31,112.52 180 top
R187  10K  [0603-RES]  43.84,109.98 180 top
R188  10K  [0603-RES]  43.84,111.25 180 top
R189  10K  [0603-RES]  43.84,112.52 180 top
R190  10K  [0603-RES]  61.37,109.98 180 top
R191  10K  [0603-RES]  61.37,111.25 180 top
R192  10K  [0603-RES]  61.37,112.52 180 top
R193  10K  [0603-RES]  78.89,109.98 180 top
R194  10K  [0603-RES]  78.89,111.25 180 top
R195  10K  [0603-RES]  78.89,112.52 180 top
R196  10K  [0603-RES]  96.42,109.98 180 top
R197  10K  [0603-RES]  96.42,111.25 180 top
R198  10K  [0603-RES]  96.42,112.52 180 top
R199  10K  [0603-RES]  113.94,109.98 180 top
R200  10K  [0603-RES]  113.94,111.25 180 top
R201  10K  [0603-RES]  113.94,112.52 180 top
R202  10K  [0603-RES]  131.47,109.98 180 top
R203  10K  [0603-RES]  131.47,111.25 180 top
R204  10K  [0603-RES]  131.47,112.52 180 top
R205  10K  [0603-RES]  149,109.98 180 top
R206  10K  [0603-RES]  149,111.25 180 top
R207  10K  [0603-RES]  149,112.52 180 top
R208  10K  [0603-RES]  166.52,109.98 180 top
R209  10K  [0603-RES]  166.52,111.25 180 top
R210  10K  [0603-RES]  166.52,112.52 180 top
R211  10K  [0603-RES]  184.05,109.98 180 top
R212  10K  [0603-RES]  184.05,111.25 180 top
R213  10K  [0603-RES]  184.05,112.52 180 top
R214  10K  [0603-RES]  201.57,109.98 180 top
R215  10K  [0603-RES]  201.57,111.25 180 top
R216  10K  [0603-RES]  201.57,112.52 180 top
SJ1  JUMPER-PAD-2-NC_BY_PASTEFULL-BOX-SILK  [PAD-JUMPER-2-NC_BY_PASTE_YES_SILK_FULL_BOX]  8.33,16.33 90 top
SJ2  JUMPER_PAD-3-1&2_NC_BY_PASTE  [PAD-HUMPER-3-1&2_NC_BY_PASTE_YES_SILK_FULL_BOX]  8.86,11.94 180 top
SJ3  JUMPER-PAD-2-NC_BY_PASTEFULL-BOX-SILK  [PAD-JUMPER-2-NC_BY_PASTE_YES_SILK_FULL_BOX]  25.86,16.33 90 top
SJ4  JUMPER_PAD-3-1&2_NC_BY_PASTE  [PAD-HUMPER-3-1&2_NC_BY_PASTE_YES_SILK_FULL_BOX]  26.39,11.94 180 top
SJ5  JUMPER-PAD-2-NC_BY_PASTEFULL-BOX-SILK  [PAD-JUMPER-2-NC_BY_PASTE_YES_SILK_FULL_BOX]  43.38,16.33 90 top
SJ6  JUMPER_PAD-3-1&2_NC_BY_PASTE  [PAD-HUMPER-3-1&2_NC_BY_PASTE_YES_SILK_FULL_BOX]  43.92,11.94 180 top
SJ7  JUMPER-PAD-2-NC_BY_PASTEFULL-BOX-SILK  [PAD-JUMPER-2-NC_BY_PASTE_YES_SILK_FULL_BOX]  60.91,16.33 90 top
SJ8  JUMPER_PAD-3-1&2_NC_BY_PASTE  [PAD-HUMPER-3-1&2_NC_BY_PASTE_YES_SILK_FULL_BOX]  61.44,11.94 180 top
SJ9  JUMPER-PAD-2-NC_BY_PASTEFULL-BOX-SILK  [PAD-JUMPER-2-NC_BY_PASTE_YES_SILK_FULL_BOX]  78.44,16.33 90 top
SJ10  JUMPER_PAD-3-1&2_NC_BY_PASTE  [PAD-HUMPER-3-1&2_NC_BY_PASTE_YES_SILK_FULL_BOX]  78.97,11.94 180 top
SJ11  JUMPER-PAD-2-NC_BY_PASTEFULL-BOX-SILK  [PAD-JUMPER-2-NC_BY_PASTE_YES_SILK_FULL_BOX]  95.96,16.33 90 top
SJ12  JUMPER_PAD-3-1&2_NC_BY_PASTE  [PAD-HUMPER-3-1&2_NC_BY_PASTE_YES_SILK_FULL_BOX]  96.49,11.94 180 top
SJ13  JUMPER-PAD-2-NC_BY_PASTEFULL-BOX-SILK  [PAD-JUMPER-2-NC_BY_PASTE_YES_SILK_FULL_BOX]  113.49,16.33 90 top
SJ14  JUMPER_PAD-3-1&2_NC_BY_PASTE  [PAD-HUMPER-3-1&2_NC_BY_PASTE_YES_SILK_FULL_BOX]  114.02,11.94 180 top
SJ15  JUMPER-PAD-2-NC_BY_PASTEFULL-BOX-SILK  [PAD-JUMPER-2-NC_BY_PASTE_YES_SILK_FULL_BOX]  131.01,16.33 90 top
SJ16  JUMPER_PAD-3-1&2_NC_BY_PASTE  [PAD-HUMPER-3-1&2_NC_BY_PASTE_YES_SILK_FULL_BOX]  131.55,11.94 180 top
SJ17  JUMPER-PAD-2-NC_BY_PASTEFULL-BOX-SILK  [PAD-JUMPER-2-NC_BY_PASTE_YES_SILK_FULL_BOX]  148.54,16.33 90 top
SJ18  JUMPER_PAD-3-1&2_NC_BY_PASTE  [PAD-HUMPER-3-1&2_NC_BY_PASTE_YES_SILK_FULL_BOX]  149.07,11.94 180 top
SJ19  JUMPER-PAD-2-NC_BY_PASTEFULL-BOX-SILK  [PAD-JUMPER-2-NC_BY_PASTE_YES_SILK_FULL_BOX]  166.07,16.33 90 top
SJ20  JUMPER_PAD-3-1&2_NC_BY_PASTE  [PAD-HUMPER-3-1&2_NC_BY_PASTE_YES_SILK_FULL_BOX]  166.6,11.94 180 top
SJ21  JUMPER-PAD-2-NC_BY_PASTEFULL-BOX-SILK  [PAD-JUMPER-2-NC_BY_PASTE_YES_SILK_FULL_BOX]  183.59,16.33 90 top
SJ22  JUMPER_PAD-3-1&2_NC_BY_PASTE  [PAD-HUMPER-3-1&2_NC_BY_PASTE_YES_SILK_FULL_BOX]  184.12,11.94 180 top
SJ23  JUMPER-PAD-2-NC_BY_PASTEFULL-BOX-SILK  [PAD-JUMPER-2-NC_BY_PASTE_YES_SILK_FULL_BOX]  201.12,16.33 90 top
SJ24  JUMPER_PAD-3-1&2_NC_BY_PASTE  [PAD-HUMPER-3-1&2_NC_BY_PASTE_YES_SILK_FULL_BOX]  201.65,11.94 180 top
SJ25  JUMPER-PAD-2-NC_BY_PASTEFULL-BOX-SILK  [PAD-JUMPER-2-NC_BY_PASTE_YES_SILK_FULL_BOX]  8.33,34.62 90 top
SJ26  JUMPER_PAD-3-1&2_NC_BY_PASTE  [PAD-HUMPER-3-1&2_NC_BY_PASTE_YES_SILK_FULL_BOX]  8.86,30.23 180 top
SJ27  JUMPER-PAD-2-NC_BY_PASTEFULL-BOX-SILK  [PAD-JUMPER-2-NC_BY_PASTE_YES_SILK_FULL_BOX]  25.86,34.62 90 top
SJ28  JUMPER_PAD-3-1&2_NC_BY_PASTE  [PAD-HUMPER-3-1&2_NC_BY_PASTE_YES_SILK_FULL_BOX]  26.39,30.23 180 top
SJ29  JUMPER-PAD-2-NC_BY_PASTEFULL-BOX-SILK  [PAD-JUMPER-2-NC_BY_PASTE_YES_SILK_FULL_BOX]  43.38,34.62 90 top
SJ30  JUMPER_PAD-3-1&2_NC_BY_PASTE  [PAD-HUMPER-3-1&2_NC_BY_PASTE_YES_SILK_FULL_BOX]  43.92,30.23 180 top
SJ31  JUMPER-PAD-2-NC_BY_PASTEFULL-BOX-SILK  [PAD-JUMPER-2-NC_BY_PASTE_YES_SILK_FULL_BOX]  60.91,34.62 90 top
SJ32  JUMPER_PAD-3-1&2_NC_BY_PASTE  [PAD-HUMPER-3-1&2_NC_BY_PASTE_YES_SILK_FULL_BOX]  61.44,30.23 180 top
SJ33  JUMPER-PAD-2-NC_BY_PASTEFULL-BOX-SILK  [PAD-JUMPER-2-NC_BY_PASTE_YES_SILK_FULL_BOX]  78.44,34.62 90 top
SJ34  JUMPER_PAD-3-1&2_NC_BY_PASTE  [PAD-HUMPER-3-1&2_NC_BY_PASTE_YES_SILK_FULL_BOX]  78.97,30.23 180 top
SJ35  JUMPER-PAD-2-NC_BY_PASTEFULL-BOX-SILK  [PAD-JUMPER-2-NC_BY_PASTE_YES_SILK_FULL_BOX]  95.96,34.62 90 top
SJ36  JUMPER_PAD-3-1&2_NC_BY_PASTE  [PAD-HUMPER-3-1&2_NC_BY_PASTE_YES_SILK_FULL_BOX]  96.49,30.23 180 top
SJ37  JUMPER-PAD-2-NC_BY_PASTEFULL-BOX-SILK  [PAD-JUMPER-2-NC_BY_PASTE_YES_SILK_FULL_BOX]  113.49,34.62 90 top
SJ38  JUMPER_PAD-3-1&2_NC_BY_PASTE  [PAD-HUMPER-3-1&2_NC_BY_PASTE_YES_SILK_FULL_BOX]  114.02,30.23 180 top
SJ39  JUMPER-PAD-2-NC_BY_PASTEFULL-BOX-SILK  [PAD-JUMPER-2-NC_BY_PASTE_YES_SILK_FULL_BOX]  131.01,34.62 90 top
SJ40  JUMPER_PAD-3-1&2_NC_BY_PASTE  [PAD-HUMPER-3-1&2_NC_BY_PASTE_YES_SILK_FULL_BOX]  131.55,30.23 180 top
SJ41  JUMPER-PAD-2-NC_BY_PASTEFULL-BOX-SILK  [PAD-JUMPER-2-NC_BY_PASTE_YES_SILK_FULL_BOX]  148.54,34.62 90 top
SJ42  JUMPER_PAD-3-1&2_NC_BY_PASTE  [PAD-HUMPER-3-1&2_NC_BY_PASTE_YES_SILK_FULL_BOX]  149.07,30.23 180 top
SJ43  JUMPER-PAD-2-NC_BY_PASTEFULL-BOX-SILK  [PAD-JUMPER-2-NC_BY_PASTE_YES_SILK_FULL_BOX]  166.07,34.62 90 top
SJ44  JUMPER_PAD-3-1&2_NC_BY_PASTE  [PAD-HUMPER-3-1&2_NC_BY_PASTE_YES_SILK_FULL_BOX]  166.6,30.23 180 top
SJ45  JUMPER-PAD-2-NC_BY_PASTEFULL-BOX-SILK  [PAD-JUMPER-2-NC_BY_PASTE_YES_SILK_FULL_BOX]  183.59,34.62 90 top
SJ46  JUMPER_PAD-3-1&2_NC_BY_PASTE  [PAD-HUMPER-3-1&2_NC_BY_PASTE_YES_SILK_FULL_BOX]  184.12,30.23 180 top
SJ47  JUMPER-PAD-2-NC_BY_PASTEFULL-BOX-SILK  [PAD-JUMPER-2-NC_BY_PASTE_YES_SILK_FULL_BOX]  201.12,34.62 90 top
SJ48  JUMPER_PAD-3-1&2_NC_BY_PASTE  [PAD-HUMPER-3-1&2_NC_BY_PASTE_YES_SILK_FULL_BOX]  201.65,30.23 180 top
SJ49  JUMPER-PAD-2-NC_BY_PASTEFULL-BOX-SILK  [PAD-JUMPER-2-NC_BY_PASTE_YES_SILK_FULL_BOX]  8.33,52.91 90 top
SJ50  JUMPER_PAD-3-1&2_NC_BY_PASTE  [PAD-HUMPER-3-1&2_NC_BY_PASTE_YES_SILK_FULL_BOX]  8.86,48.51 180 top
SJ51  JUMPER-PAD-2-NC_BY_PASTEFULL-BOX-SILK  [PAD-JUMPER-2-NC_BY_PASTE_YES_SILK_FULL_BOX]  25.86,52.91 90 top
SJ52  JUMPER_PAD-3-1&2_NC_BY_PASTE  [PAD-HUMPER-3-1&2_NC_BY_PASTE_YES_SILK_FULL_BOX]  26.39,48.51 180 top
SJ53  JUMPER-PAD-2-NC_BY_PASTEFULL-BOX-SILK  [PAD-JUMPER-2-NC_BY_PASTE_YES_SILK_FULL_BOX]  43.38,52.91 90 top
SJ54  JUMPER_PAD-3-1&2_NC_BY_PASTE  [PAD-HUMPER-3-1&2_NC_BY_PASTE_YES_SILK_FULL_BOX]  43.92,48.51 180 top
SJ55  JUMPER-PAD-2-NC_BY_PASTEFULL-BOX-SILK  [PAD-JUMPER-2-NC_BY_PASTE_YES_SILK_FULL_BOX]  60.91,52.91 90 top
SJ56  JUMPER_PAD-3-1&2_NC_BY_PASTE  [PAD-HUMPER-3-1&2_NC_BY_PASTE_YES_SILK_FULL_BOX]  61.44,48.51 180 top
SJ57  JUMPER-PAD-2-NC_BY_PASTEFULL-BOX-SILK  [PAD-JUMPER-2-NC_BY_PASTE_YES_SILK_FULL_BOX]  78.44,52.91 90 top
SJ58  JUMPER_PAD-3-1&2_NC_BY_PASTE  [PAD-HUMPER-3-1&2_NC_BY_PASTE_YES_SILK_FULL_BOX]  78.97,48.51 180 top
SJ59  JUMPER-PAD-2-NC_BY_PASTEFULL-BOX-SILK  [PAD-JUMPER-2-NC_BY_PASTE_YES_SILK_FULL_BOX]  95.96,52.91 90 top
SJ60  JUMPER_PAD-3-1&2_NC_BY_PASTE  [PAD-HUMPER-3-1&2_NC_BY_PASTE_YES_SILK_FULL_BOX]  96.49,48.51 180 top
SJ61  JUMPER-PAD-2-NC_BY_PASTEFULL-BOX-SILK  [PAD-JUMPER-2-NC_BY_PASTE_YES_SILK_FULL_BOX]  113.49,52.91 90 top